# EAGLE board HLM1_CNC (EAGLE 8.4.0)
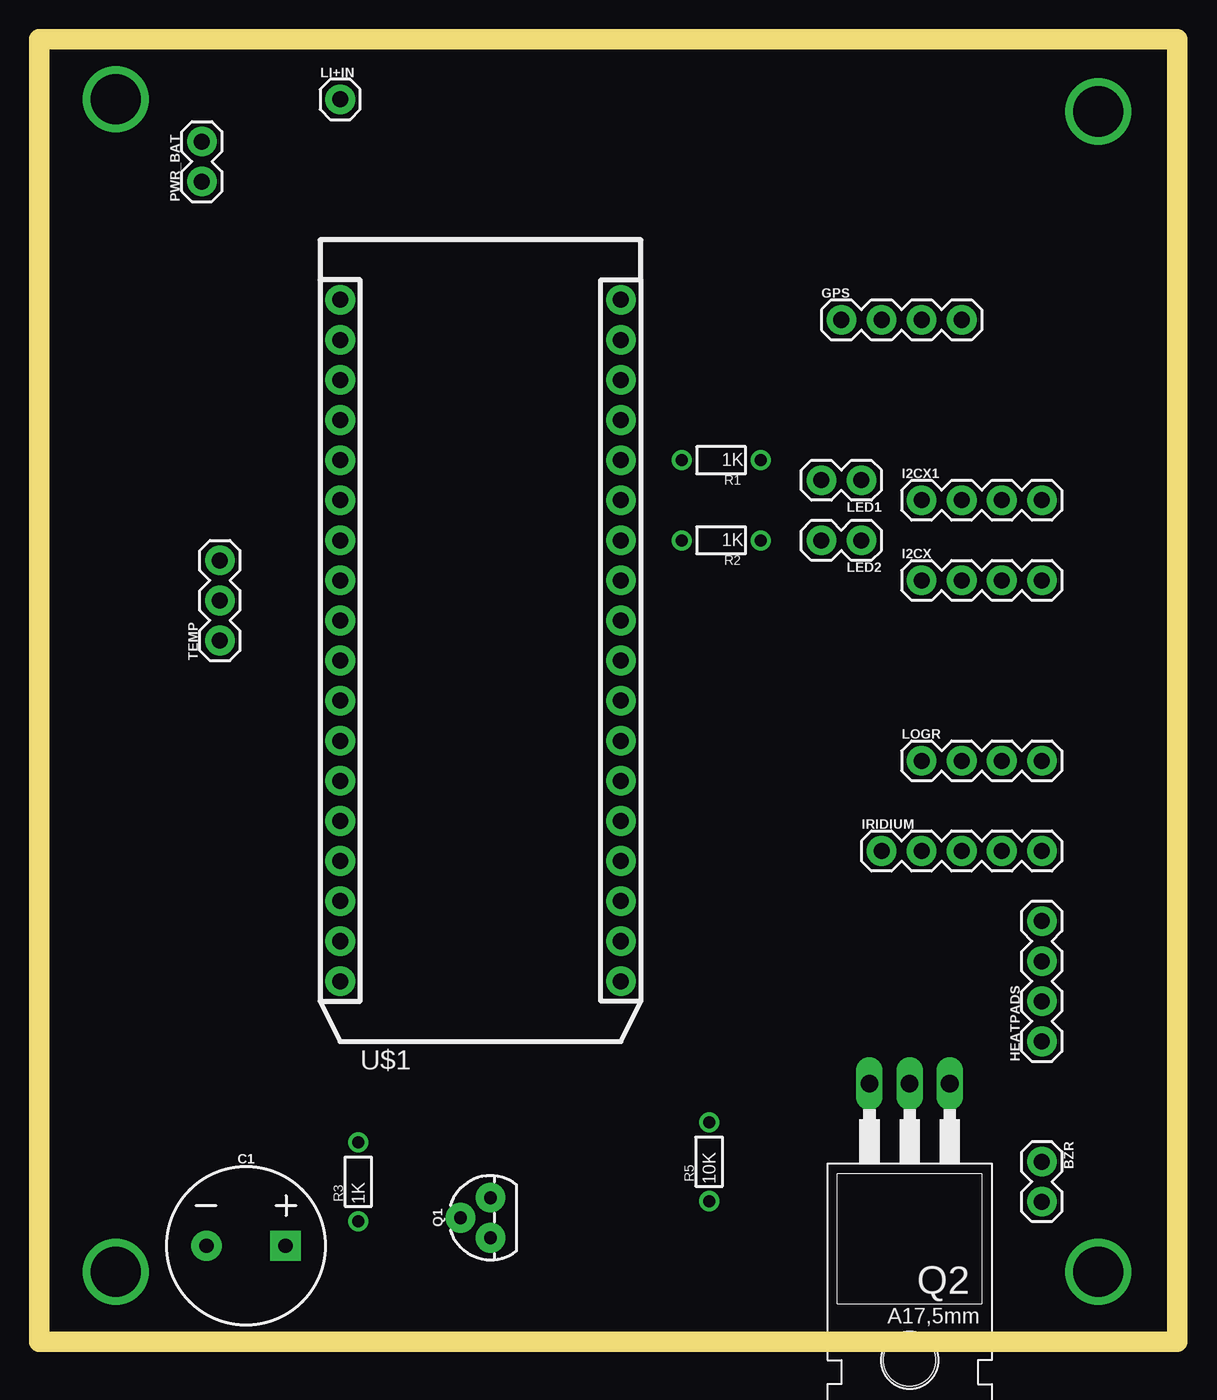
[diagram p0: board, top side]
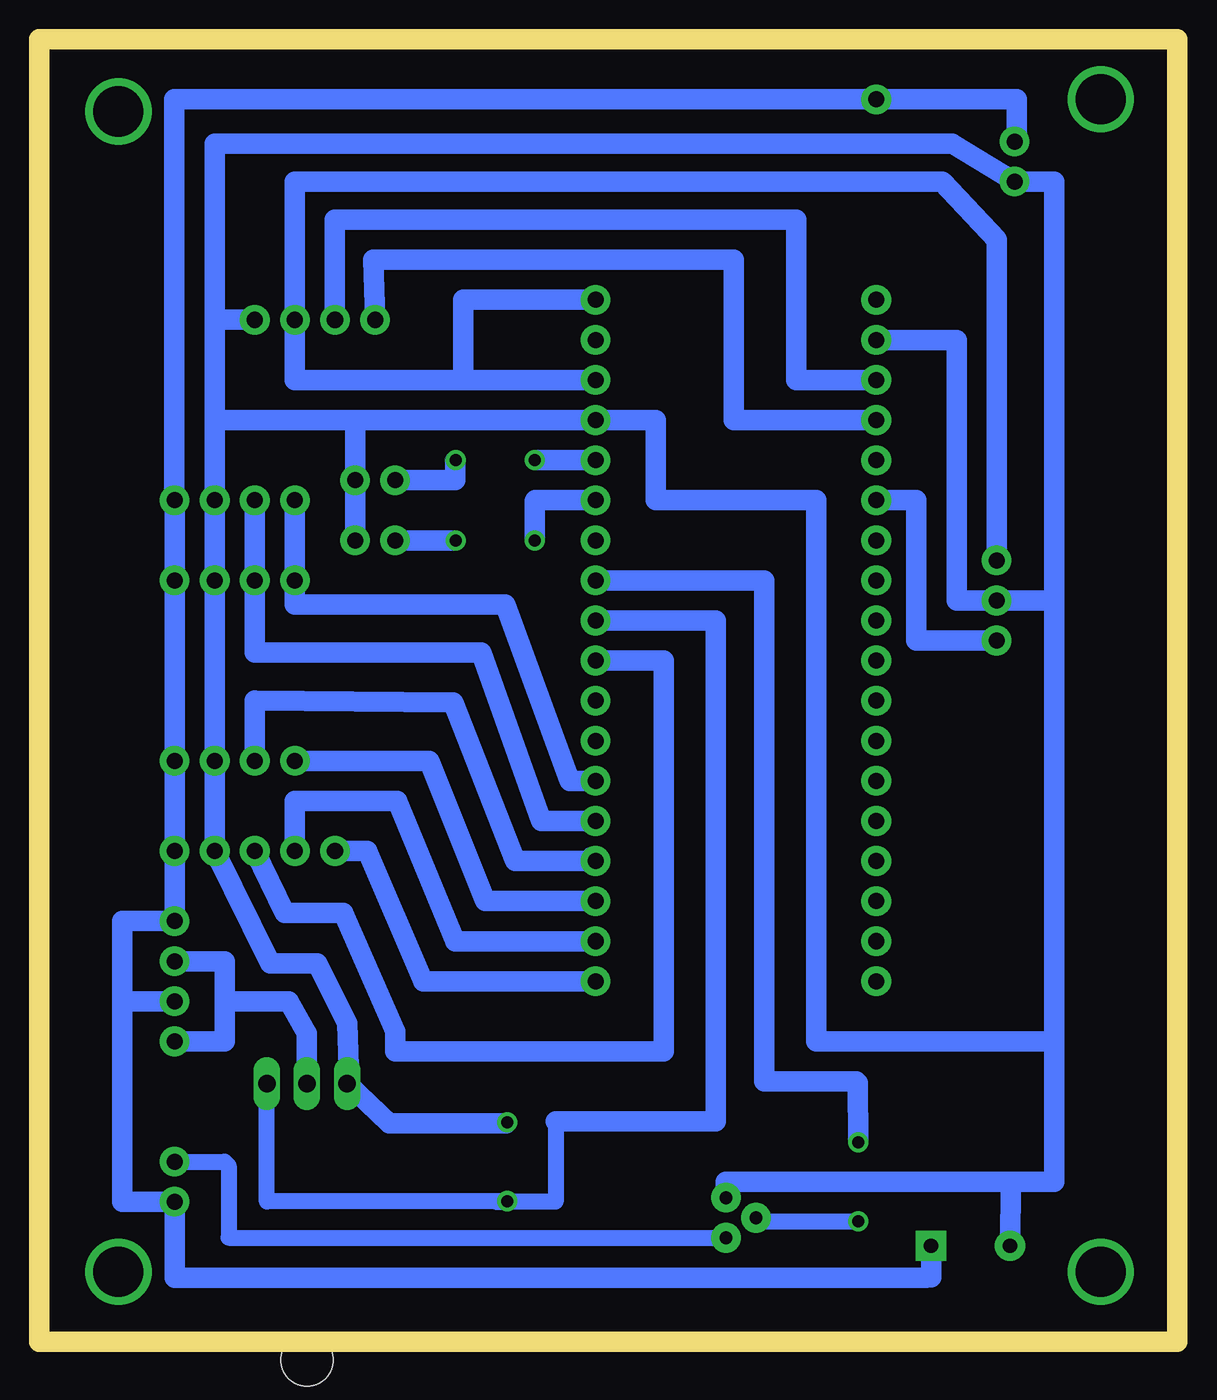
[diagram p1: board, bottom side, seen from below]

Size 72.06 x 82.54 mm. Coordinates in mm from the lower left corner, seen from the top.
Outline: 0,0 72.06,0 72.06,82.54 0,82.54 0,0
Copper layers (1*16): Top 0.035mm / dielectric 1.5mm / Bottom 0.035mm
Design rules "default": minimum track width 6mil, minimum drill 0.35mm, track to track 6mil, track to pad 6mil, pad to pad 6mil, via to via 6mil, smd to smd 6mil, copper to edge 40mil, drill to drill 6mil, minimum pad ring 10mil, minimum via ring 8mil, stop-mask expansion 4mil, vias tented up to drill 0mil, thermal gap 10mil

## Footprints (pad centres in the part's own frame; a part is rotated, then mirrored left to right if it is on the bottom)
1X02 = drill 1.016 pad 1.88: 1 0,0; 2 2.54,0
CPOL-RADIAL-5MM-10MM = drill 0.9 pad 1.93 square: + 2.5,0 | drill 0.9 pad 1.93: - -2.5,0
1X04 = drill 1.016 pad 1.88: 1 0,0; 2 2.54,0; 3 5.08,0; 4 7.62,0
1X05 = drill 1.016 pad 1.88: 1 0,0; 2 2.54,0; 3 5.08,0; 4 7.62,0; 5 10.16,0
1X01 = drill 1.016 pad 1.88: 1 0,0
TO-92 = drill 0.813 pad 1.88: 1 -1.27,0; 2 0,1.905; 3 1.27,0
TO220 = drill 1.118 long: 1 -2.54,-6.35; 2 0,-6.35; 3 2.54,-6.35 | hole 3.302: 0,11.176
1/6W-RES = drill 0.762: 1 -2.5,0; 2 2.5,0
1X03 = drill 1.016 pad 1.88: 1 0,0; 2 2.54,0; 3 5.08,0
ELECTRON = drill 1.016 pad 1.88: 1 1.27,46.99; 2 1.27,44.45; 3 1.27,41.91; 4 1.27,39.37; 5 1.27,36.83; 6 1.27,34.29; 7 1.27,31.75; 8 1.27,29.21; 9 1.27,26.67; 10 1.27,24.13; 11 1.27,21.59; 12 1.27,19.05; 13 1.27,16.51; 14 1.27,13.97; 15 1.27,11.43; 16 1.27,8.89; 17 1.27,6.35; 18 1.27,3.81; 19 19.05,3.81; 20 19.05,6.35; 21 19.05,8.89; 22 19.05,11.43; 23 19.05,13.97; 24 19.05,16.51; 25 19.05,19.05; 26 19.05,21.59; 27 19.05,24.13; 28 19.05,26.67; 29 19.05,29.21; 30 19.05,31.75; 31 19.05,34.29; 32 19.05,36.83; 33 19.05,39.37; 34 19.05,41.91; 35 19.05,44.45; 36 19.05,46.99

## Placement (x,y rotation side)
BZR  [1X02]  63.5,11.43 270 top
C1  1mF  [CPOL-RADIAL-5MM-10MM]  13.08,6.1 0 top
GPS  [1X04]  50.8,64.77 0 top
HEATPADS  [1X04]  63.5,19.05 90 top
I2CX  [1X04]  55.88,48.26 0 top
I2CX1  [1X04]  55.88,53.34 0 top
IRIDIUM  [1X05]  53.34,31.11 0 top
LED1  [1X02]  52.07,54.61 180 top
LED2  [1X02]  52.07,50.8 180 top
LI+IN  [1X01]  19.05,78.74 0 top
LOGR  [1X04]  55.88,36.83 0 top
PWR_BAT  [1X02]  10.29,73.53 90 top
Q1  600mA/40V  [TO-92]  28.57,7.87 90 top
Q2  IRF540  [TO220]  55.12,10.03 180 top
R1  1K  [1/6W-RES]  43.18,55.88 180 top
R2  1K  [1/6W-RES]  43.18,50.8 180 top
R3  1K  [1/6W-RES]  20.19,10.16 90 top
R5  10K  [1/6W-RES]  42.42,11.43 90 top
TEMP  455-1750-1-ND  [1X03]  11.43,44.45 90 top
U$1  ELECTRON_WITH_HEADERS  [ELECTRON]  17.78,19.05 0 top

## Library data of the parts
BZR IRIDIUM LED1 LED2 LI+IN PWR_BAT = SparkFun-Connectors
C1 = SparkFun-Capacitors; PROD_ID: CAP-09538
GPS HEATPADS I2CX I2CX1 LOGR = SparkFun-Connectors; PROD_ID: CONN-09696
Q1 = SparkFun-DiscreteSemi; PROD_ID: TRANS-09536
Q2 = transistor-fet
R1-R3 R5 = SparkFun-Passives
TEMP = SparkFun-Connectors; PROD_ID: XXX-00000
U$1 = Particle-Devices

## Nets
3.3V: GPS.3 TEMP.3 U$1.34 U$1.36
BASE: Q1.2 R3.1
D3: Q2.1 R5.1 U$1.28
GND: C1.- GPS.4 I2CX1.3 I2CX.3 IRIDIUM.4 LED1.1 LED2.1 LOGR.3 PWR_BAT.1 Q1.3 Q2.3 R5.2 TEMP.2 U$1.2 U$1.33
IRWKP: IRIDIUM.3 U$1.27
N$1: TEMP.1 U$1.6
N$3: R1.2 U$1.32
N$6: R3.2 U$1.29
N$8: LED1.2 R1.1
N$9: BZR.1 Q1.1
N$11: HEATPADS.1 HEATPADS.3 Q2.2
N$13: R2.2 U$1.31
N$14: IRIDIUM.2 U$1.20
N$15: I2CX1.1 I2CX.1 U$1.24
N$16: LED2.2 R2.1
RX: GPS.1 U$1.4
SDA: I2CX1.2 I2CX.2 U$1.23
TX: GPS.2 U$1.3
UART4_RX: LOGR.1 U$1.21
UART4_TX: LOGR.2 U$1.22
UART5_RX: IRIDIUM.1 U$1.19
V_BATT: BZR.2 C1.+ HEATPADS.2 HEATPADS.4 I2CX1.4 I2CX.4 IRIDIUM.5 LI+IN.1 LOGR.4 PWR_BAT.2
VIN: U$1.1

## Tracks (layer width: path | path; a pad name or v marks a point on that pad's centre or on a via)
3.3V
  Bottom 1.3: 45.21,60.96 45.21,66.04 U$1.36 | 45.21,60.96 55.88,60.96 GPS.3 55.88,73.53 14.86,73.53 11.43,69.85 TEMP.3 | 45.21,60.96 U$1.34
BASE
  Bottom 1: 26.46,7.66 R3.1
  Bottom 1.3: Q1.2 26.46,7.66
D3
  Bottom 1.016: 39.37,13.97 39.37,8.89 42.46,8.89 | 43.18,8.89 42.46,8.89 | 42.46,8.89 R5.1 57.62,8.93 57.66,8.89 Q2.1
  Bottom 1.3: U$1.28 29.21,45.72 29.21,13.97 39.37,13.97
GND
  Bottom 1.3: 28.57,10.03 Q1.3 28.57,10.16 10.54,10.16 | R5.2 42.51,13.84 49.91,13.84 Q2.3 52.45,16.51 52.58,20.19 54.46,23.98 57.45,23.98 IRIDIUM.4 LOGR.3 I2CX.3 I2CX1.3 60.96,58.42 | 7.77,46.99 TEMP.2 13.97,46.99 13.97,63.5 U$1.2 | 7.77,19.05 7.77,46.99 | 7.77,19.05 7.77,10.16 10.54,10.16 | 7.77,19.05 22.86,19.05 22.86,53.34 33.02,53.34 33.02,58.42 U$1.33 52.07,58.42 | 52.07,58.42 60.96,58.42 | 60.96,58.42 60.96,64.77 | GPS.4 60.96,64.77 | 60.96,64.77 60.96,75.95 14.22,75.95 PWR_BAT.1 7.77,73.53 7.77,46.99 | LED2.1 LED1.1 52.07,58.42 | C1.- 10.54,10.16
IRWKP
  Bottom 1.3: U$1.27 32.51,43.18 32.51,18.41 49.53,18.41 49.53,19.68 52.83,27.18 56.52,27.18 IRIDIUM.3
N$1
  Bottom 1.3: U$1.6 16.51,53.34 16.51,44.45 TEMP.1
N$3
  Bottom 1.3: U$1.32 R1.2
N$4  (via drill 3.17)
  other vias: 67.06,77.98
N$5  (via drill 3.17)
  other vias: 67.06,4.45
N$6
  Bottom 1.3: U$1.29 26.16,48.26 26.16,16.51 20.32,16.51 20.23,16.42 R3.2
N$7  (via drill 3.17)
  other vias: 4.83,4.45
N$8
  Bottom 1.3: R1.1 45.72,55.84 45.72,54.61 LED1.2
N$9
  Bottom 1.016: BZR.1 60.33,11.43 60.07,11.18 60.07,6.6 Q1.1
N$11
  Bottom 1.3: HEATPADS.3 60.33,24.13 60.33,21.59 | 60.33,21.59 60.33,19.05 HEATPADS.1 | Q2.2 55.24,16.51 55.12,16.64 55.12,19.56 56.26,21.59 60.33,21.59
N$13
  Bottom 1.3: U$1.31 40.64,53.34 40.68,53.3 R2.2
N$14
  Bottom 1.3: U$1.20 45.72,25.4 49.4,34.29 55.88,34.29 IRIDIUM.2
N$15
  Bottom 1.3: I2CX1.1 I2CX.1 55.88,46.74 42.55,46.74 38.48,35.56 U$1.24
N$16
  Bottom 1.3: LED2.2 R2.1
N$17  (via drill 3.17)
  other vias: 4.83,78.74
RX
  Bottom 1.3: U$1.4 28.07,58.42 28.07,68.58 50.93,68.58 GPS.1
SDA
  Bottom 1.3: I2CX1.2 I2CX.2 58.42,43.69 44.07,43.69 40.26,33.02 U$1.23
TX
  Bottom 1.3: U$1.3 24.13,60.96 24.13,71.12 53.34,71.12 GPS.2
UART4_RX
  Bottom 1.3: LOGR.1 47.37,36.83 43.81,27.94 U$1.21
UART4_TX
  Bottom 1.3: 37.08,30.73 U$1.22 41.91,30.48 45.85,40.51 58.42,40.64 LOGR.2
UART5_RX
  Bottom 1.3: U$1.19 47.75,22.86 51.31,31.11 IRIDIUM.1
V_BATT
  Bottom 1.3: 66.83,21.59 66.83,26.67 HEATPADS.4 IRIDIUM.5 LOGR.4 I2CX.4 I2CX1.4 63.53,53.21 63.53,78.74 LI+IN.1 10.16,78.74 10.16,76.2 PWR_BAT.2 | 66.83,21.59 HEATPADS.2 | 66.83,21.59 66.83,8.89 BZR.2 63.5,4.06 15.88,4.06 15.58,4.1 C1.+